# Allegro board BD9D321EFJ-E2EVK-101_BRD_REV00_2014-0926_1800.brd
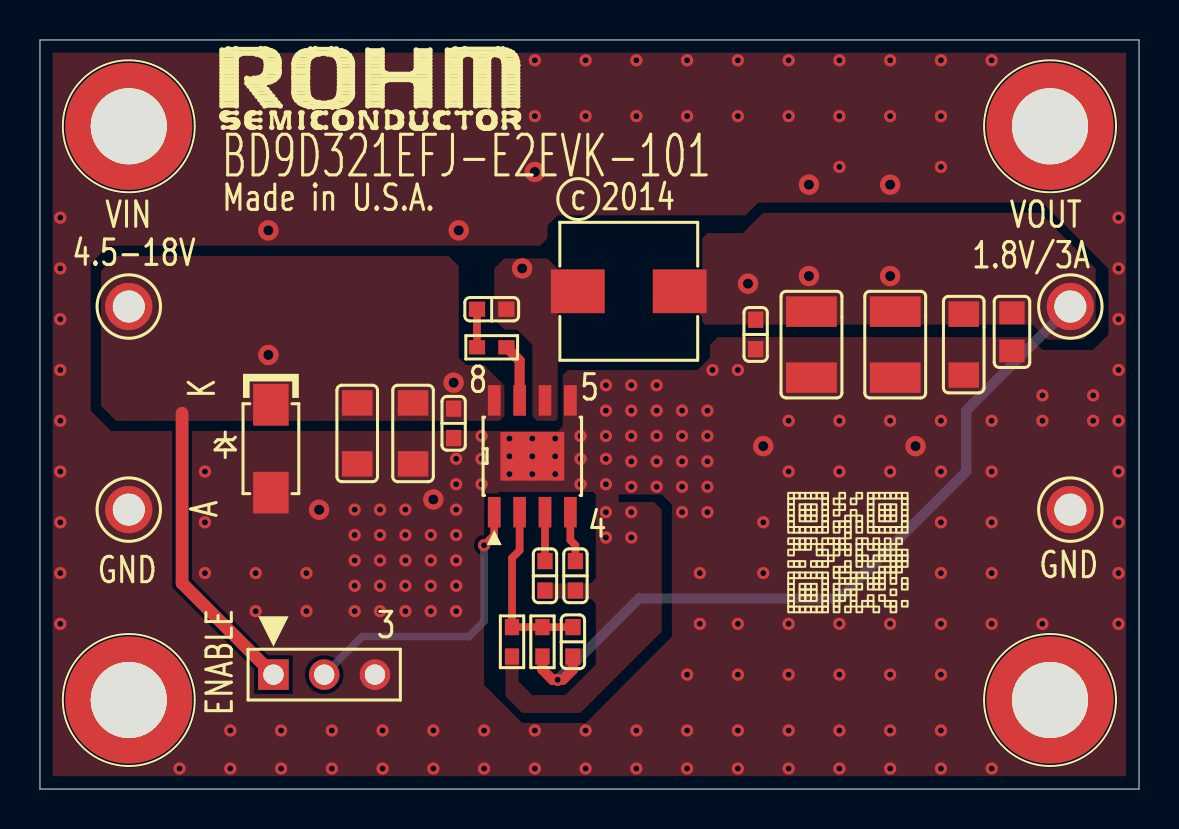
[diagram p0: board, top side]
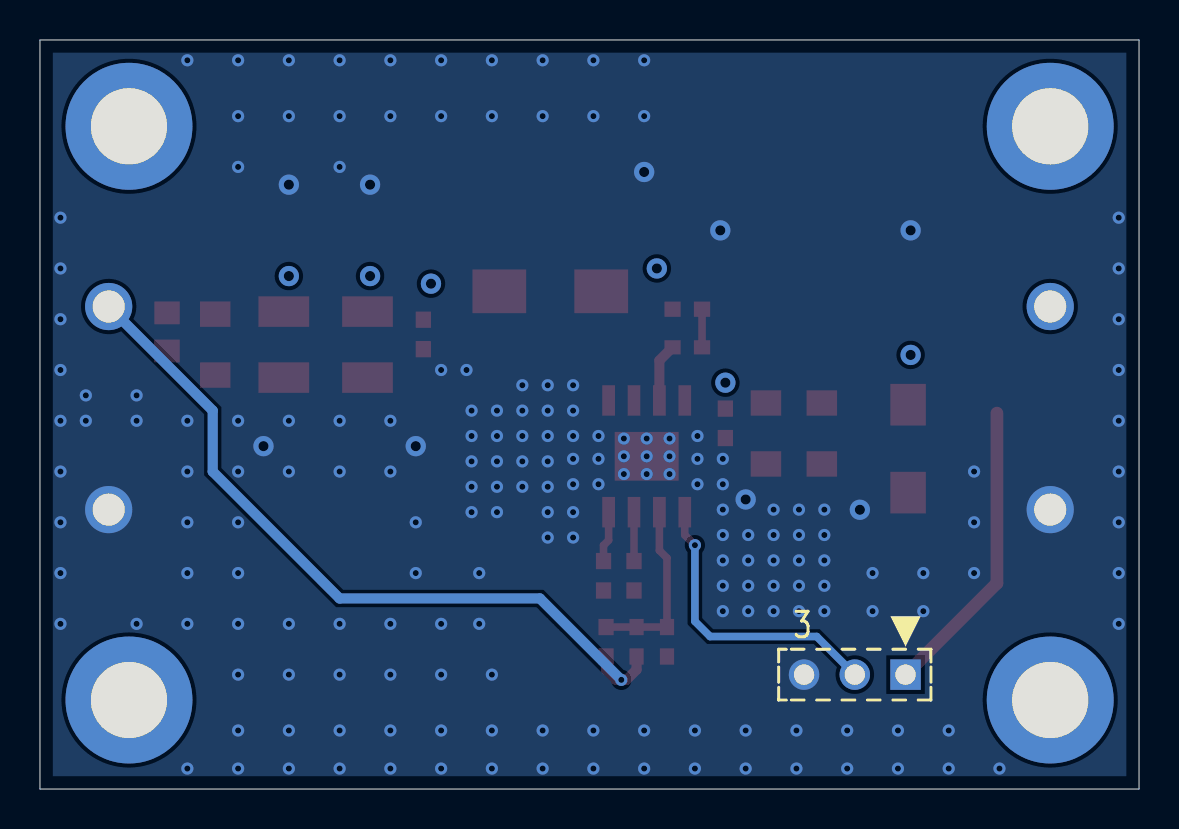
[diagram p1: board, bottom side, seen from below]

Outline 55 x 37.47 mm; copper layers: TOP, L2_GND, L3_GND, BOTTOM. Coordinates in mm from the lower left corner of the outline.
Outline path: 0,37.47 55,37.47 55,0 0,0 0,37.47

## Placement (name value [footprint] x y rotation side)
C1  100pF  [C0603]  26.67 7.37 270 top
C2  0.1uF  [C0603]  20.7 18.3 90 top
C3  10uF  [C1206]  18.67 17.79 270 top
C4  10uF  [C1206]  15.88 17.79 270 top
C5  22uF  [C1210]  38.61 22.23 270 top
C6  22uF  [C1210]  42.8 22.23 270 top
C7  TBD  [C0603]  35.81 22.74 90 top
C8  TBD  [C0805]  48.64 22.87 270 top
C9  TBD  [C1206]  46.23 22.23 270 top
C10  0.1uF  [C0603]  22.61 24 0 top
C11  1uF  [C0603]  25.27 10.67 90 top
C12  3300pF  [C0603]  26.8 10.67 90 top
D1  SMAJ18A  [DO-214AC]  11.56 17.03 270 top
J1  87224-3  [HDR_THVT_1X3_100]  11.68 5.72 0 top
L1  2.2uH  [SMT_6P9X6P9]  29.46 24.9 0 top
NOREF  -  [unnamed]  4.45 33.15 0 top
NOREF#2  -  [unnamed]  50.55 33.15 0 top
NOREF#3  -  [#2]  55 0 0 top
NOREF#4  -  [#2]  0 37.47 0 top
NOREF#5  -  [#2]  55 0 90 top
NOREF#6  -  [unnamed]  4.45 4.45 0 top
NOREF#7  -  [#2]  0 0 0 top
NOREF#8  -  [#2]  -63.5 -124.58 0 top
NOREF#9  -  [#2]  -18.29 -37.33 0 top
NOREF#10  -  [unnamed]  50.55 4.45 0 top
NOREF#11  -  [#2]  0 37.47 0 top
NOREF#12  -  [#2]  0 0 0 top
R1  30k  [R0603]  25.15 7.37 270 top
R2  22k  [R0603]  23.62 7.37 90 top
R3  0  [R0603]  22.61 22.1 0 top
TP1  TP_TH_63MIL_RED  [TP_TH]  4.45 24.14 0 top
TP2  TP_TH_63MIL_BLK  [TP_TH]  4.45 13.98 0 top
TP3  TP_TH_63MIL_RED  [TP_TH]  51.56 24.14 0 top
TP4  TP_TH_63MIL_BLK  [TP_TH]  51.56 13.98 0 top
U1  BD9D321EFJ  [HTSOP-J8]  24.64 16.64 0 top

## Library data of the parts
C1-C12 = CAP_VER
D1 = DIODE_ZENER_VER_0
J1 = CONN PCB 3x1_2.100"
L1 = INDUCTOR
R1-R3 = R
TP1 TP3 = TP_TH_63MIL_RED
TP2 TP4 = TP_TH_63MIL_BLK
U1 = BD9D321EFJ

## Footprints (pads in the part's own frame, mm; a bottom-side part is the same pattern mirrored in y, then rotated)
C0603
  rect 0.813x0.762 smd: 1(0.737,0) 2(-0.737,0)
C0805
  rect 1.143x1.27 smd: 1(-0.953,0) 2(0.953,0)
C1206
  rect 1.27x1.524 smd: 1(-1.524,0) 2(1.524,0)
C1210
  rect 1.524x2.54 smd: 1(-1.651,0) 2(1.651,0)
DO-214AC
  rect 2.083x1.778 smd: 1(-2.2,0) 2(2.2,0)
HDR_THVT_1X3_100
  rect 1.524x1.524 hole 1.016: 1(0,0)
  round 1.524 hole 1.016: 2(2.54,0) 3(5.08,0)
HTSOP-J8
  rect 0.635x1.524 smd: 1(-1.905,-2.794) 2(-0.635,-2.794) 3(0.635,-2.794) 4(1.905,-2.794) 5(1.905,2.794) 6(0.635,2.794) 7(-0.635,2.794) 8(-1.905,2.794)
  rect 3.2x2.438 smd: 9(0,0)
R0603
  rect 0.813x0.711 smd: 1(0.737,0) 2(-0.737,0)
SMT_6P9X6P9
  rect 2.692x2.184 smd: 1(-2.55,0) 2(2.55,0)
TP_TH
  round 2.362 hole 1.6: 1(0,0)
unnamed
  round 6.35 hole 3.81: (0,0)

## Nets
GND: C2.2 C3.2 C4.2 C5.2 C6.2 C7.2 C8.2 C9.2 C11.2 C12.2 D1.2(A) J1.3 R2.2 TP2.1 TP4.1 U1.5(GND) U1.9(EPAD)
VIN: C2.1 C3.1 C4.1 D1.1(C) J1.1 TP1.1 U1.8(VIN)
BOOT: R3.1 U1.7(BOOT)
EN: J1.2 U1.1(EN)
FB: C1.2 R1.2 R2.1 U1.2(FB)
SS: C12.1 U1.4(SS)
SW: C10.1 L1.1 U1.6(SW)
VOUT: C1.1 C5.1 C6.1 C7.1 C8.1 C9.1 L1.2 R1.1 TP3.1
VREG: C11.1 U1.3(VREG)
N41170: C10.2 R3.2

## Via types
v1: diameter 0.61, hole 0.305, TOP to BOTTOM, 187 vias
v2: diameter 1.016, hole 0.508, TOP to BOTTOM, 15 vias

## Routing (per net, layer and track width the routed paths; a pad name or vN(x,y) marks a point on that pad's centre or on a via; arc(x,y) is an arc through that point)
GND: length 29.3
  L2_GND w0.508: 51.56,12.62 TP4.1 ; TP4.1 52.92,13.98 ; TP4.1 51.56,15.34 ; TP4.1 50.2,13.98 ; 3.09,13.98 TP2.1 ; TP2.1 4.45,15.34 ; TP2.1 4.45,12.62 ; TP2.1 5.8,13.98 ; 15.82,5.72 J1.3 ; J1.3 16.76,6.66 ; J1.3 16.76,4.78 ; J1.3 17.7,5.72
  L3_GND w0.508: 16.76,4.78 J1.3 ; J1.3 17.7,5.72 ; J1.3 16.76,6.66 ; J1.3 15.82,5.72 ; 50.2,13.98 TP4.1 ; TP4.1 51.56,12.62 ; TP4.1 52.92,13.98 ; TP4.1 51.56,15.34 ; TP2.1 4.45,15.34 ; TP2.1 4.45,12.62 ; TP2.1 5.8,13.98 ; TP2.1 3.09,13.98
  vias: v1(1.02,28.58) v1(1.02,26.04) v1(1.02,23.5) v1(1.02,20.96) v1(1.02,18.42) v1(1.02,15.88) v1(1.02,13.34) v1(1.02,10.8) v1(1.02,8.26) v1(6.99,1.02) v1(8.26,15.88) v1(8.26,13.34) v1(8.26,10.8) v1(9.53,2.93) v1(9.53,1.02) v1(10.79,10.8) v1(10.79,8.9) v1(12.06,2.93) v1(12.06,1.02) v1(13.34,10.8) v1(13.34,8.9) v1(14.61,2.93) v1(14.61,1.02) v1(15.75,13.98) v1(15.75,12.71) v1(15.75,11.44) v1(15.75,10.17) v1(15.75,8.9) v1(17.02,13.98) v1(17.02,12.71) v1(17.02,11.44) v1(17.02,10.17) v1(17.02,8.9) v1(17.14,2.93) v1(17.14,1.02) v1(18.29,13.98) v1(18.29,12.71) v1(18.29,11.44) v1(18.29,10.17) v1(18.29,8.9) v1(19.56,12.71) v1(19.56,11.44) v1(19.56,10.17) v1(19.56,8.9) v1(19.68,2.93) v1(19.68,1.02) v1(20.83,16.52) v1(20.83,15.25) v1(20.83,13.98) v1(20.83,12.71) v1(20.83,11.44) v1(20.83,10.17) v1(20.83,8.9) v1(22.1,17.66) v1(22.1,16.52) v1(22.1,15.25) v1(22.23,2.93) v1(22.23,1.02) v1(23.5,17.53) v1(23.5,16.64) v1(23.5,15.76) v1(24.64,17.53) v1(24.64,16.64) v1(24.64,15.76) v1(24.77,36.46) v1(24.77,33.66) v1(24.77,2.93) v1(24.77,1.02) v1(25.78,17.53) v1(25.78,16.64) v1(25.78,15.76) v1(27.05,17.66) v1(27.05,16.52) v1(27.05,15.25) v1(27.3,36.46) v1(27.3,33.66) v1(27.3,2.93) v1(27.3,1.02) v1(28.32,20.2) v1(28.32,18.93) v1(28.32,17.66) v1(28.32,16.52) v1(28.32,15.25) v1(28.32,13.85) v1(28.32,12.58) v1(29.59,20.2) v1(29.59,18.93) v1(29.59,17.66) v1(29.59,16.39) v1(29.59,15.12) v1(29.59,13.85) v1(29.59,12.58) v1(29.84,36.46) v1(29.84,33.66) v1(29.84,2.93) v1(29.84,1.02) v1(30.86,20.2) v1(30.86,18.93) v1(30.86,17.66) v1(30.86,16.39) v1(30.86,15.12) v1(32.13,18.93) v1(32.13,17.66) v1(32.13,16.39) v1(32.13,15.12) v1(32.13,13.85) v1(32.38,36.46) v1(32.38,33.66) v1(32.38,5.72) v1(32.38,2.93) v1(32.38,1.02) v1(33.02,10.8) v1(33.02,8.26) v1(33.4,18.93) v1(33.4,17.66) v1(33.4,16.39) v1(33.4,15.12) v1(33.4,13.85) v1(33.66,20.96) v1(34.92,36.46) v1(34.92,33.66) v1(34.92,20.96) v1(34.92,8.26) v1(34.92,5.72) v1(34.92,2.93) v1(34.92,1.02) v1(36.2,13.34) v1(36.2,10.8) v1(37.47,36.46) v1(37.47,33.66) v1(37.47,18.42) v1(37.47,15.88) v1(37.47,8.26) v1(37.47,5.72) v1(37.47,2.93) v1(37.47,1.02) v1(40.01,36.46) v1(40.01,33.66) v1(40.01,31.12) v1(40.01,18.42) v1(40.01,15.88) v1(40.01,8.26) v1(40.01,5.72) v1(40.01,2.93) v1(40.01,1.02) v1(42.55,36.46) v1(42.55,33.66) v1(42.55,18.42) v1(42.55,15.88) v1(42.55,8.26) v1(42.55,5.72) v1(42.55,2.93) v1(42.55,1.02) v1(45.09,36.46) v1(45.09,33.66) v1(45.09,31.12) v1(45.09,18.42) v1(45.09,15.88) v1(45.09,13.34) v1(45.09,10.8) v1(45.09,8.26) v1(45.09,5.72) v1(45.09,2.93) v1(45.09,1.02) v1(47.62,36.46) v1(47.62,18.42) v1(47.62,15.88) v1(47.62,13.34) v1(47.62,10.8) v1(47.62,8.26) v1(47.62,1.02) v1(50.16,19.69) v1(50.16,18.42) v1(50.16,8.26) v1(52.7,19.69) v1(52.7,18.42) v1(53.98,28.58) v1(53.98,26.04) v1(53.98,23.5) v1(53.98,20.96) v1(53.98,18.42) v1(53.98,15.88) v1(53.98,13.34) v1(53.98,10.8) v1(53.98,8.26) v2(11.43,27.95) v2(13.97,13.97) v2(19.68,14.49) v2(20.95,27.95) v2(24.77,30.87) v2(36.2,17.15) v2(38.48,30.23) v2(42.55,30.23) v2(43.81,17.15)
VIN: length 15
  TOP w0.635: 7.11,18.8 7.11,10.29 J1.1
  vias: v2(11.43,21.72) v2(20.7,20.33)
BOOT: length 2.9
  TOP w0.508: U1.7 24,21.44 R3.1
EN: length 14.8
  TOP w0.381: v1(22.23,12.2) 22.73,12.71 U1.1
  BOTTOM w0.381: J1.2 16.13,7.63 21.46,7.63 22.23,8.39 v1(22.23,12.2)
FB: length 9
  TOP w0.381: C1.2 R1.2 R2.1 23.62,11.56 24,11.94 U1.2
SS: length 2.6
  TOP w0.381: U1.4 26.54,12.45 26.8,12.19 C12.1
SW:
  vias: v2(24.13,26.04)
VOUT: length 38.4
  TOP w0.508: R1.1 25.15,5.97 25.65,5.46 v1(25.91,5.46) 26.16,5.46 26.67,5.97 C1.1
  BOTTOM w0.508: v1(25.91,5.46) 29.98,9.53 40.01,9.53 46.35,15.88 46.35,18.93 TP3.1
  vias: v2(35.43,25.28) v2(38.48,25.66) v2(42.55,25.66)
VREG: length 2.4
  TOP w0.381: C11.1 25.27,13.85
N41170: length 1.9
  TOP w0.381: R3.2 C10.2

## Copper pours and planes (outline as drawn; the poured copper is in the pictures)
GND on TOP: 0.64,0.64 0.64,36.84 54.36,36.84 54.36,0.64 ; 2 cut-outs
GND on BOTTOM: 0.64,0.64 54.36,0.64 54.36,36.84 0.64,36.84
GND on L2_GND, L3_GND: 0.64,0.64 0.64,36.84 54.36,36.84 54.36,0.64
VIN on TOP: 23.24,18.67 22.99,18.41 3.81,18.41 3.05,19.18 3.05,25.91 3.81,26.67 20.45,26.67 20.95,26.16 20.95,21.59 21.34,21.21 22.23,21.21 23.24,20.19
SW on TOP: 25.4,26.54 23.24,26.54 22.73,26.04 22.73,23.5 23.24,22.99 23.88,22.99 24.64,22.23 24.64,18.67 24.89,18.41 25.78,18.41 25.91,18.54 25.91,23.75 26.04,23.88 28.07,23.88 28.19,24 28.19,25.78 28.07,25.91 26.04,25.91
VOUT on TOP: 50.42,22.48 49.66,23.24 33.27,23.24 33.15,23.37 33.15,23.62 32.89,23.88 30.86,23.88 30.73,24 30.73,25.78 30.86,25.91 33.02,25.91 33.15,26.04 33.15,27.56 33.4,27.81 35.18,27.81 36.2,28.83 50.04,28.83 52.83,26.04 52.83,23.11 52.2,22.48

## Text on the board
Ref Des/Silkscreen Top: 4.5-18V | GND | VIN | Made in U.S.A. | c 2014 | 1.8V/3A | VOUT | ENABLE | BD9D321EFJ-E2EVK-101
L2_GND: L2_GND
L3_GND: L3_GND
User.17: 14. Rounding is allowed on 90 degree corners with the size of | 12. Inside corners should be rounded-off | 13. Changes to board geometries and apertures are not | 10. Bow and Twist | 11. Inspection | standard routing bit. | allowed unless they are approved by customer. | 4. Drilling | 5. Finish | 9. Packaging | 8. Cleanliness | 7. Electrical Test | 3. Soldermask | photoimageable soldermask, 003 max. thickness. | Soldermask over bare copper. | Soldermask is allowed in via holes. | Bow and twist to be .007 IN/IN or .090 max according to IPC-A-600D. | NOTES: | 2. Material | 6. Silkscreen | to conduct a thorough review of the artwork and media for | writing (in advance of manufacturing) of any changes, revisions,or | 1. Specifications. | as meaxured by the omega meter 600SMD. | A. All hole diameters are finished sizes. | B. All hole to be +/- .003 from true position unless otherwise specified. | C. All hole diameters to be +/- .003 unless otherwise specified. | D. An NC drill file has been supplied - see drill table. | A. Plate thru with copper .0010 min to .002 max. thickness drill size | dimension apply after plating. | B. Use gold immersion over nickel. | C. Finished boards shall not have nicks, | scratches, voids, exposed copper, poor plating, all misdrilled holes. | manufacturability in the supplier's process compliance to all | A. Boards shall be free of fiber glass dust or any other foreign material. | B. Finished boards must conform to 0.01 MG/IN max NAcL ionic contamination | A. All boards shall be 100% electrically tested for opens/short at 10 volts. | MIL-SPEC boards to be tested at 40 volts. | B. Apply test stamp in non-legend area on solder side of PCB. | C. Test is required on both sides of the board. | Solder mask both sides with (green color) liquid | A. FR4. | B. Color to be opaque. | A. Silkscreen using white non-conductive epoxy or equivalent (both sides). | B. No silkscreen allowed on exposed lands. | C. Silkscreen must be a minimum of 3mm away form fiducial marks. | D. Minimum clearance between silkscreen legend and vias, pads, or holes | to be .005. | E. Silkscreen is allowed in via holes. | There shall be a max of 25 units per package, individually wrapped, | and shipped in cardboard cratons with sufficient surrounding | material to prevend shipping damage. | A.Automatic optical inspection of all layers required. | B.The impedance should be controlled by stackup layer. | gerber and drill data when applicable. | A. Fabricate IAW  IPC600, latest revision. | B. Producibility study - It is the respondsibility  of the supplier | corrections made or recommendations to ensure conformance to | D. This drawing is to be used in conjunction with the provided | E. All notes are "Unless Otherwise Specified." | standards, and of  any specifications that  cannot be met. | applicable specifications. Customer must be advised in
User.29: Layer name | Prepreg | BOTTOM | L3_GND | TOP | L2_GND | L | 1 | TOTAL 62 MILs +/-10% thickness board | a | - | y | 4 | e | r | s | 41.20 | 2.70 | 5.00 | T | ( | m | h | C | i | c | u | l | k | ) | . | D | P | w | 2 oz | t | H | F | o | z | p | V
User.30: FIGURE | SIZE | 12.0 | 20.0 | 40.0 | 63.0 | 150.0 | DRILL CHART: TOP to BOTTOM | ALL UNITS ARE IN MILS | TOLERANCE | +3.0/-10.0 | +3.0/-3.0 | PLATED | QTY | 187 | 15 | 3 | 4
